# EAGLE board Converter Board (EAGLE 8.3.1)

Size 101.6 x 101.6 mm. Coordinates in mm from the lower left corner, seen from the top.
Outline: 14,0 87.6,0 87.6,7.8 101.6,7.8 101.6,101.6 0,101.6 0,7.8 14,7.8 14,0
Copper layers (1*16): Top 0.035mm / dielectric 1.5mm / Bottom 0.035mm
Design rules "battery_balancer": minimum track width 6mil, minimum drill 0.35mm, track to track 0.205mm, track to pad 0.205mm, pad to pad 0.205mm, via to via 0.205mm, smd to smd 6mil, copper to edge 40mil, drill to drill 6mil, minimum pad ring 10mil, minimum via ring 8mil, stop-mask expansion 4mil, vias tented up to drill 0mil, thermal gap 10mil
Holes 3.26 mm at 3.17,98.42 98.42,98.42

## Footprints (pad centres in the part's own frame; a part is rotated, then mirrored left to right if it is on the bottom)
39-30-?06? = drill 1.422 pad 2.54 square: 1 4.191,0 | drill 1.422 pad 2.54 octagon: 2 0,0; 3 -4.191,0; 4 4.191,5.512; 5 0,5.512; 6 -4.191,5.512 | hole 3: -4.191,-7.3; 4.191,-7.3
3.3VCONV = drill 0.762 square: 1 19.05,29.718; 2 19.05,27.178; 3 19.05,24.638; 9 19.05,9.398; 11 19.05,4.318; 14 2.54,4.318; 16 2.54,9.398; 22 2.54,24.638; 23 2.54,27.178 | hole 0.762: 19.05,4.318; 19.05,9.398; 2.54,4.318; 2.54,9.398; 19.05,29.718; 19.05,27.178; 19.05,24.638; 2.54,24.638; 2.54,27.178
12VCONV = drill 1.524 square: 1,+VIN 3.556,26.035; 2,ON/OFF 3.556,18.415; 3,-VIN 3.556,10.795; 5,-SENSE 54.356,22.225; 6,TRIM 54.356,18.415; 7,+SENSE 54.356,14.605 | drill 2.032 square: 4,-VOUT 54.356,26.035; 8,+VOUT 54.356,10.795 | hole 1.524: 3.556,18.415; 3.556,26.035; 3.556,10.795; 54.356,18.415; 54.356,22.225; 54.356,14.605 | hole 2.032: 54.356,26.035; 54.356,10.795
5530843-6-BOARDFINGERS = smd 1.651 x 6.35: 3.3VP1 0.826,3.175; 3.3VP2 3.365,3.175; 3.3VP3 5.905,3.175; CAN_H 51.626,3.175; CAN_L 54.166,3.175; EXTRA29 16.066,3.175; EXTRA30 18.605,3.175; EXTRA31 21.145,3.175; EXTRA32 23.686,3.175; EXTRA33 26.226,3.175; EXTRA34 28.765,3.175; EXTRA35 31.305,3.175; EXTRA36 33.846,3.175; EXTRA37 46.545,3.175; EXTRA38 44.005,3.175; EXTRA39 41.465,3.175; EXTRA40 38.925,3.175; EXTRA41 36.386,3.175; GND1 8.445,3.175; GND2 10.986,3.175; GND3 13.525,3.175; KILL_SWITCH 49.086,3.175; SCL_DEPTH 59.245,3.175; SCL_ESC 69.406,3.175; SCL_SENSOR 64.326,3.175; SDA_DEPTH 56.706,3.175; SDA_ESC 66.865,3.175; SDA_SENSOR 61.785,3.175 | smd 1.651 x 6.35 bottom: EXTRA1 0.826,3.175; EXTRA2 3.365,3.175; EXTRA3 5.905,3.175; EXTRA4 8.445,3.175; EXTRA5 10.986,3.175; EXTRA6 13.525,3.175; EXTRA7 16.066,3.175; EXTRA8 18.605,3.175; EXTRA9 21.145,3.175; EXTRA10 23.686,3.175; EXTRA11 26.226,3.175; EXTRA12 28.765,3.175; EXTRA13 31.305,3.175; EXTRA14 33.846,3.175; EXTRA15 36.386,3.175; EXTRA16 38.925,3.175; EXTRA17 41.465,3.175; EXTRA18 44.005,3.175; EXTRA19 46.545,3.175; EXTRA20 49.086,3.175; EXTRA21 51.626,3.175; EXTRA22 54.166,3.175; EXTRA23 56.706,3.175; EXTRA24 59.245,3.175; EXTRA25 61.785,3.175; EXTRA26 64.326,3.175; EXTRA27 66.865,3.175; EXTRA28 69.406,3.175

## Placement (x,y rotation side)
P1  39-30-06?  [39-30-?06?]  -69.85,-188.91 0 top  (outside the outline)
P2  39-30-06?  [39-30-?06?]  9.53,55.56 0 top
U$1  3.3VCONV  [3.3VCONV]  22.23,26.99 0 top
U$2  12VCONV  [12VCONV]  22.23,61.91 0 top
U$3  5530843  [5530843-6-BOARDFINGERS]  15.88,0 0 top

## Library data of the parts
P1 P2 = con-molex-mini-fit
U$1 = 3.3V Converter
U$2 = 12VCONV
U$3 = 5530843-6

## Nets
N$1: P2.4 P2.5 P2.6 U$1.22 U$1.23 U$2.1,+VIN
N$2: P2.1 P2.2 P2.3 U$1.2 U$1.3 U$2.3,-VIN
N$5: U$1.14 U$3.3.3VP1 U$3.3.3VP2 U$3.3.3VP3
N$6: U$1.16 U$3.GND1 U$3.GND2 U$3.GND3
N$9: P1.1 P1.2 P1.3 U$2.4,-VOUT
N$10: P1.4 P1.5 P1.6 U$2.8,+VOUT

## Tracks (layer width: path | path; a pad name or v marks a point on that pad's centre or on a via)
N$1  (5 unrouted)
N$2  (5 unrouted)
N$5  (3 unrouted)
N$6  (3 unrouted)
N$9  (3 unrouted)
N$10  (3 unrouted)

## Text on the board
tPlace: The Ohio State Univerity / Center for Automotive Research